# Altium PCB LED-V1.PcbDoc
Units mil, origin at the board's own origin, x right, y up, seen from the top; angles counter-clockwise.
Board outline 3897.64 x 3897.64 mil, 2 copper layers (Top Layer, Bottom Layer); 137 components, 105 nets, 345 pads, 51 vias.
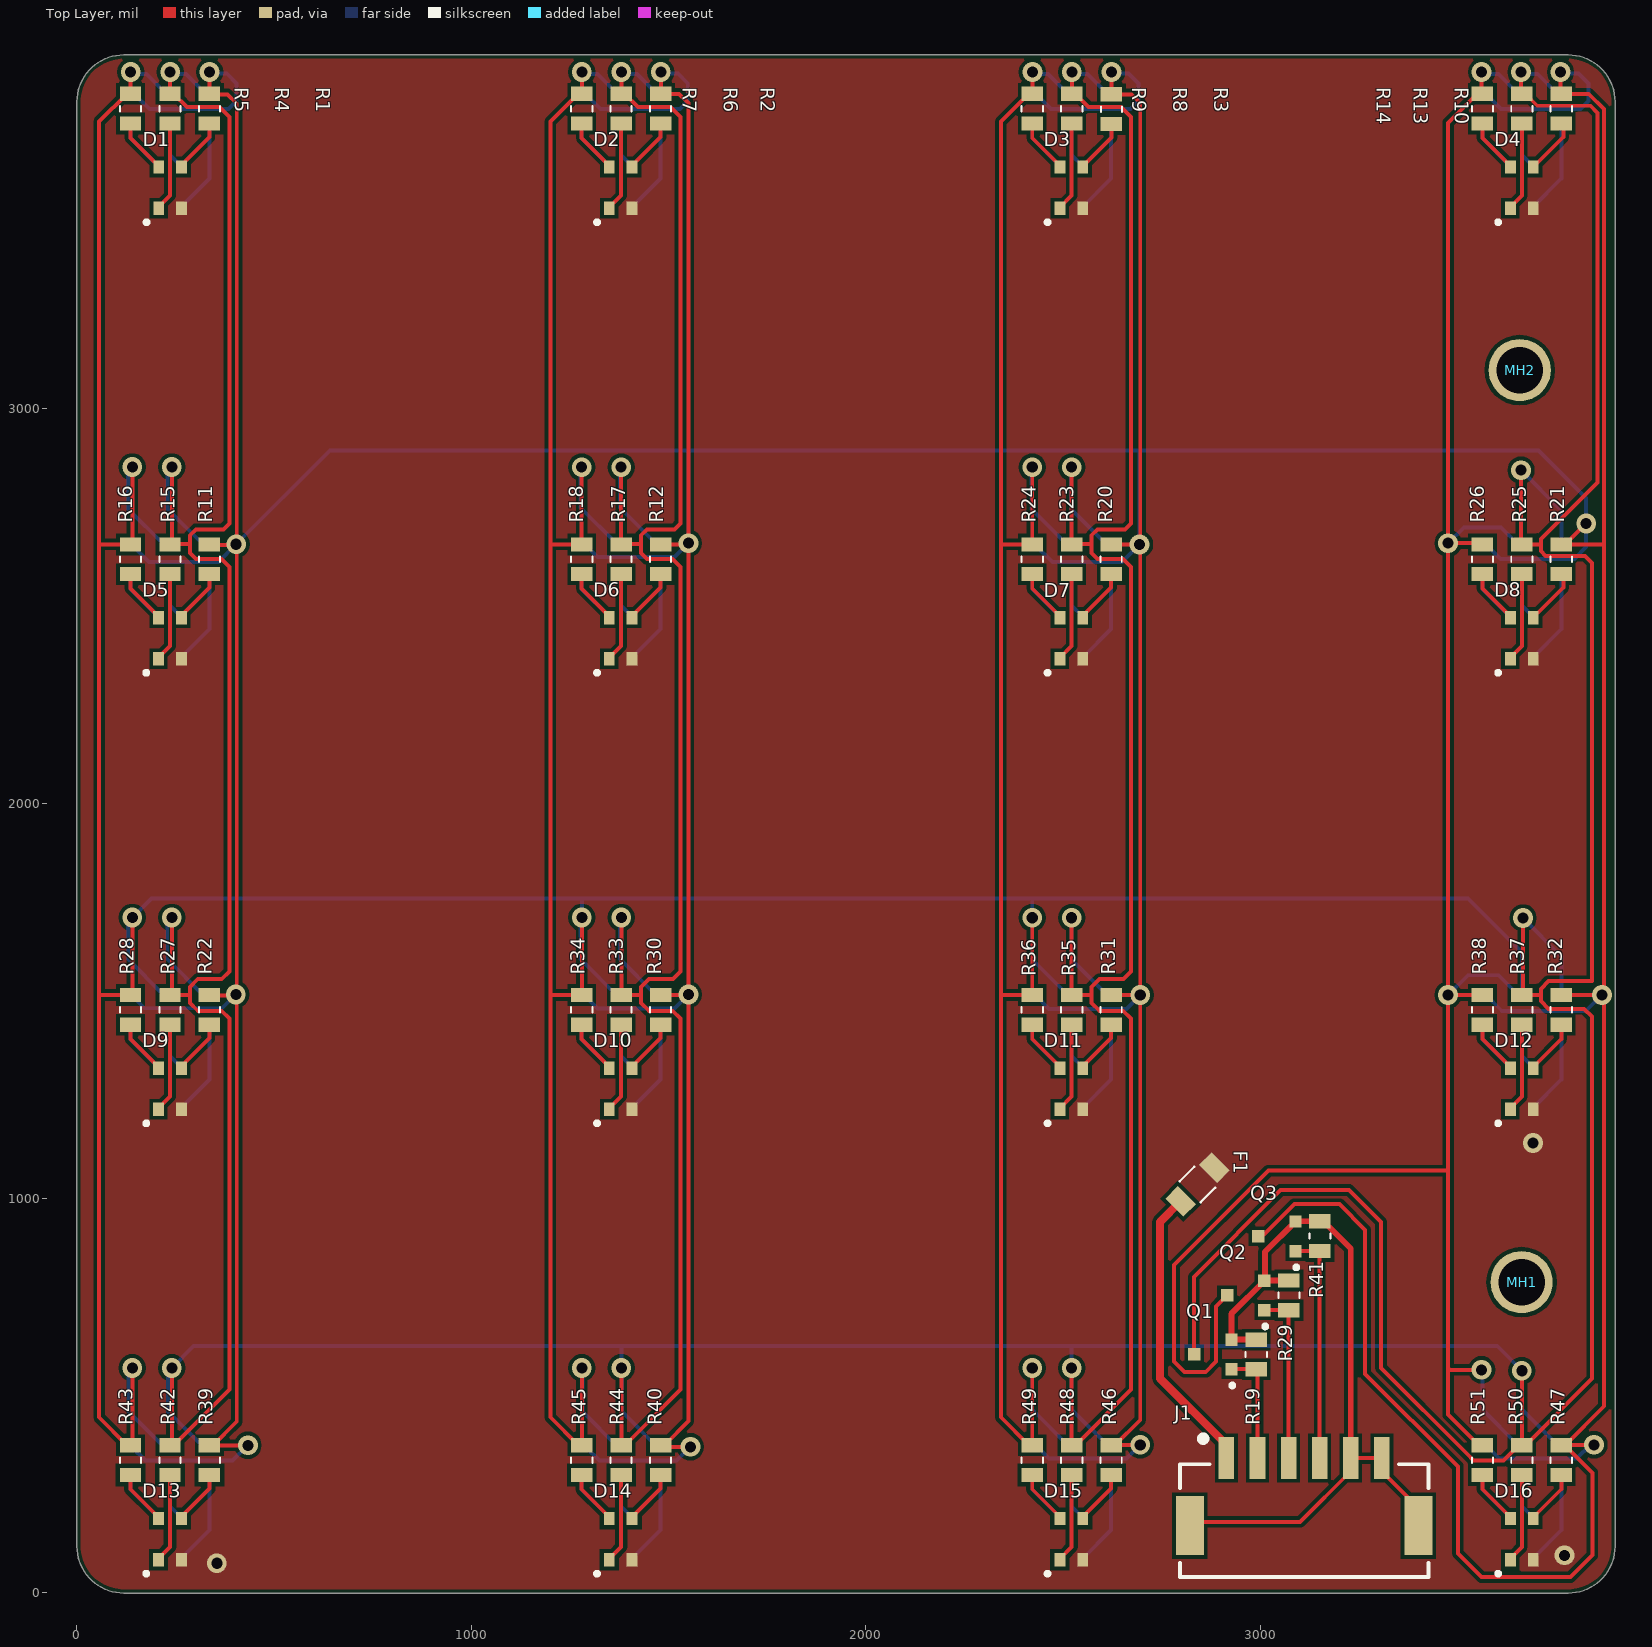
[diagram p0: Top Layer view]
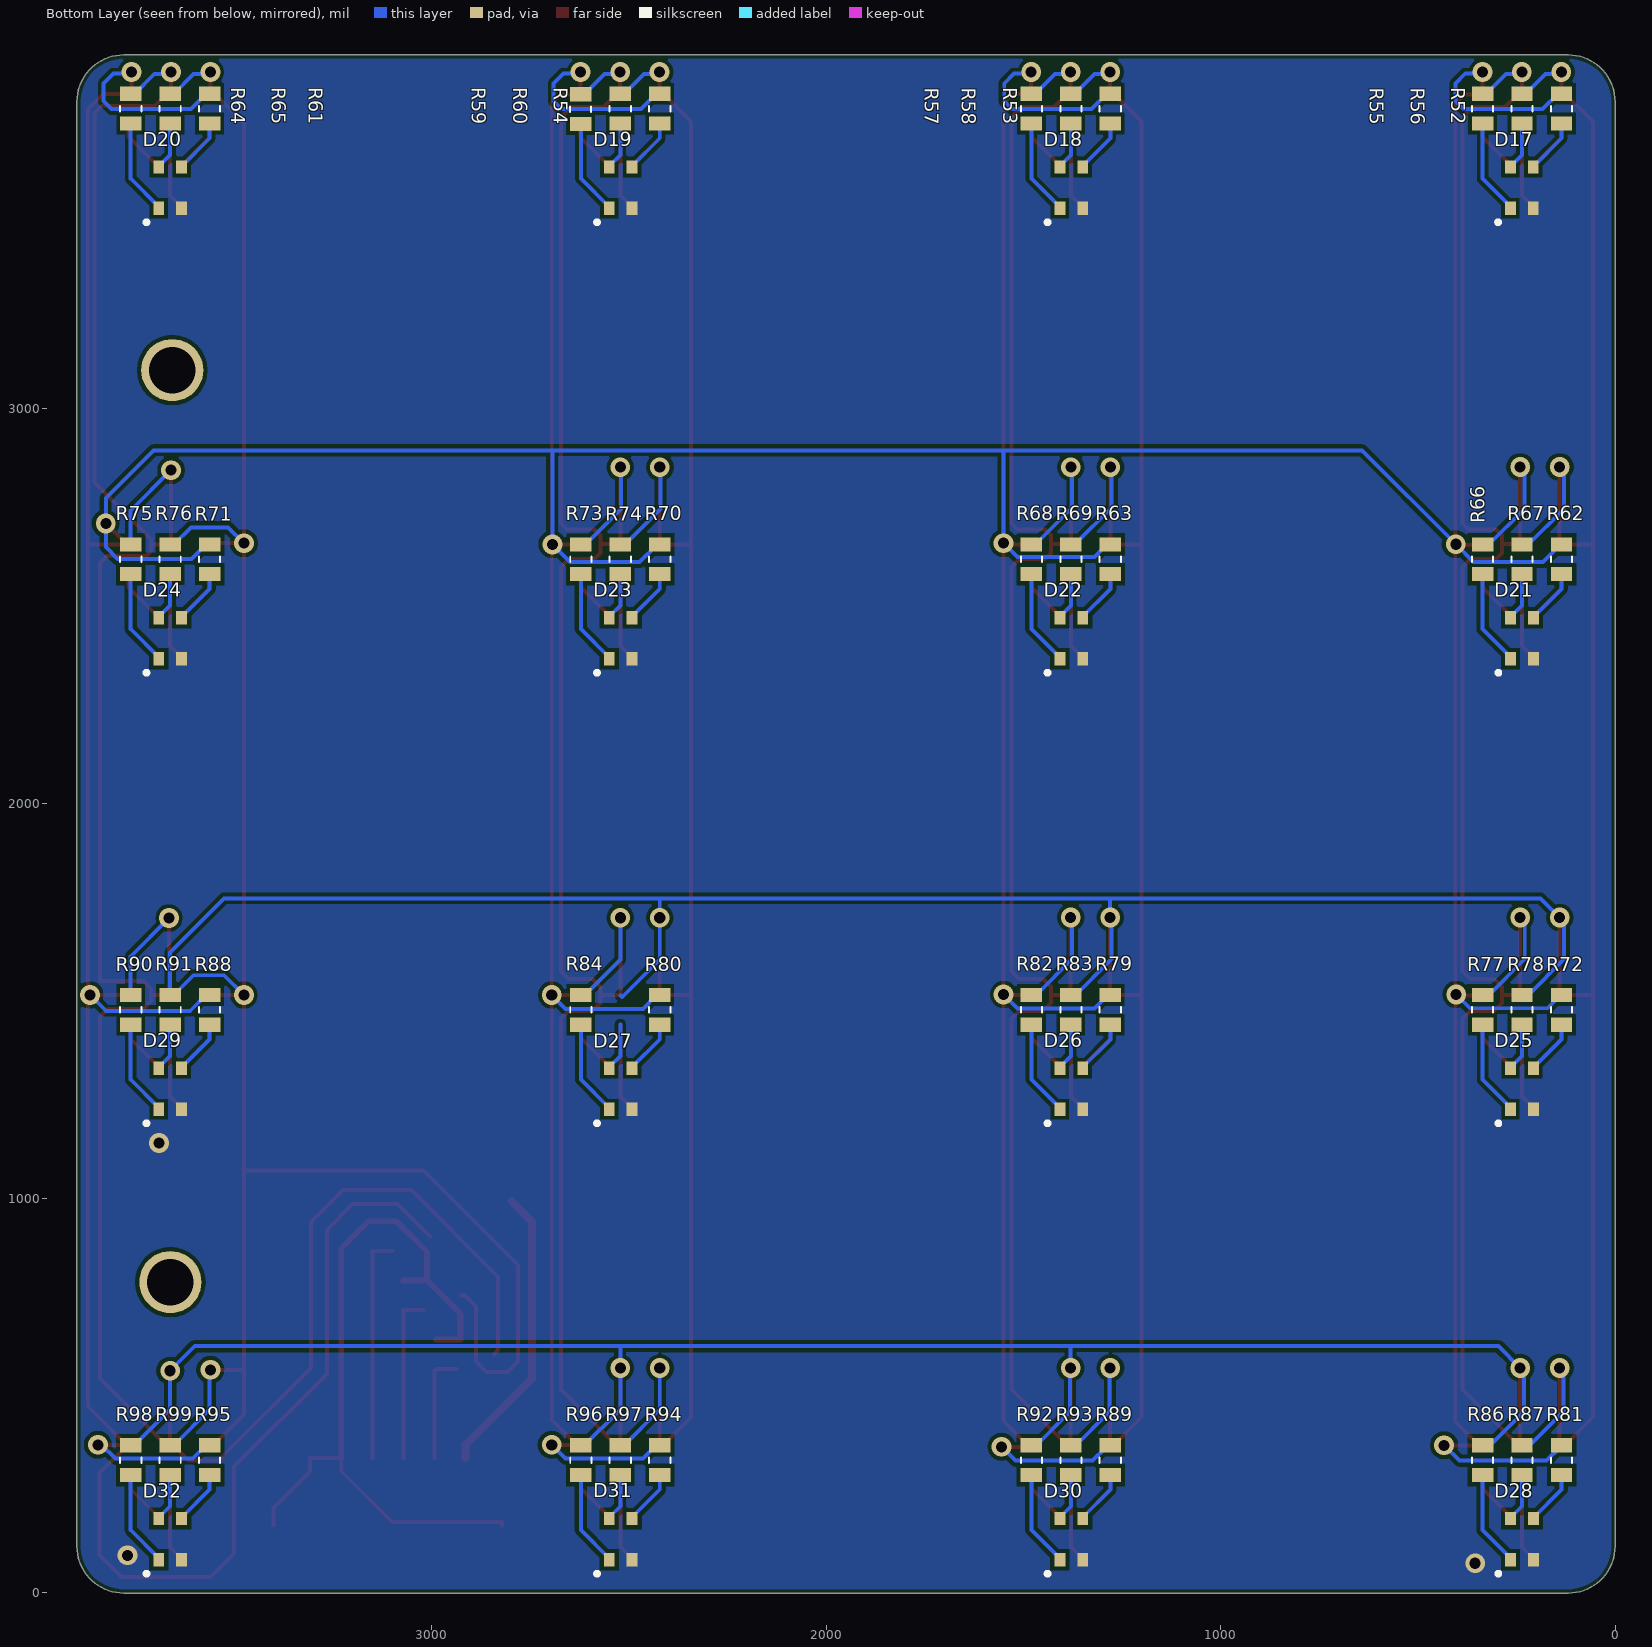
[diagram p1: Bottom Layer view, seen from below]
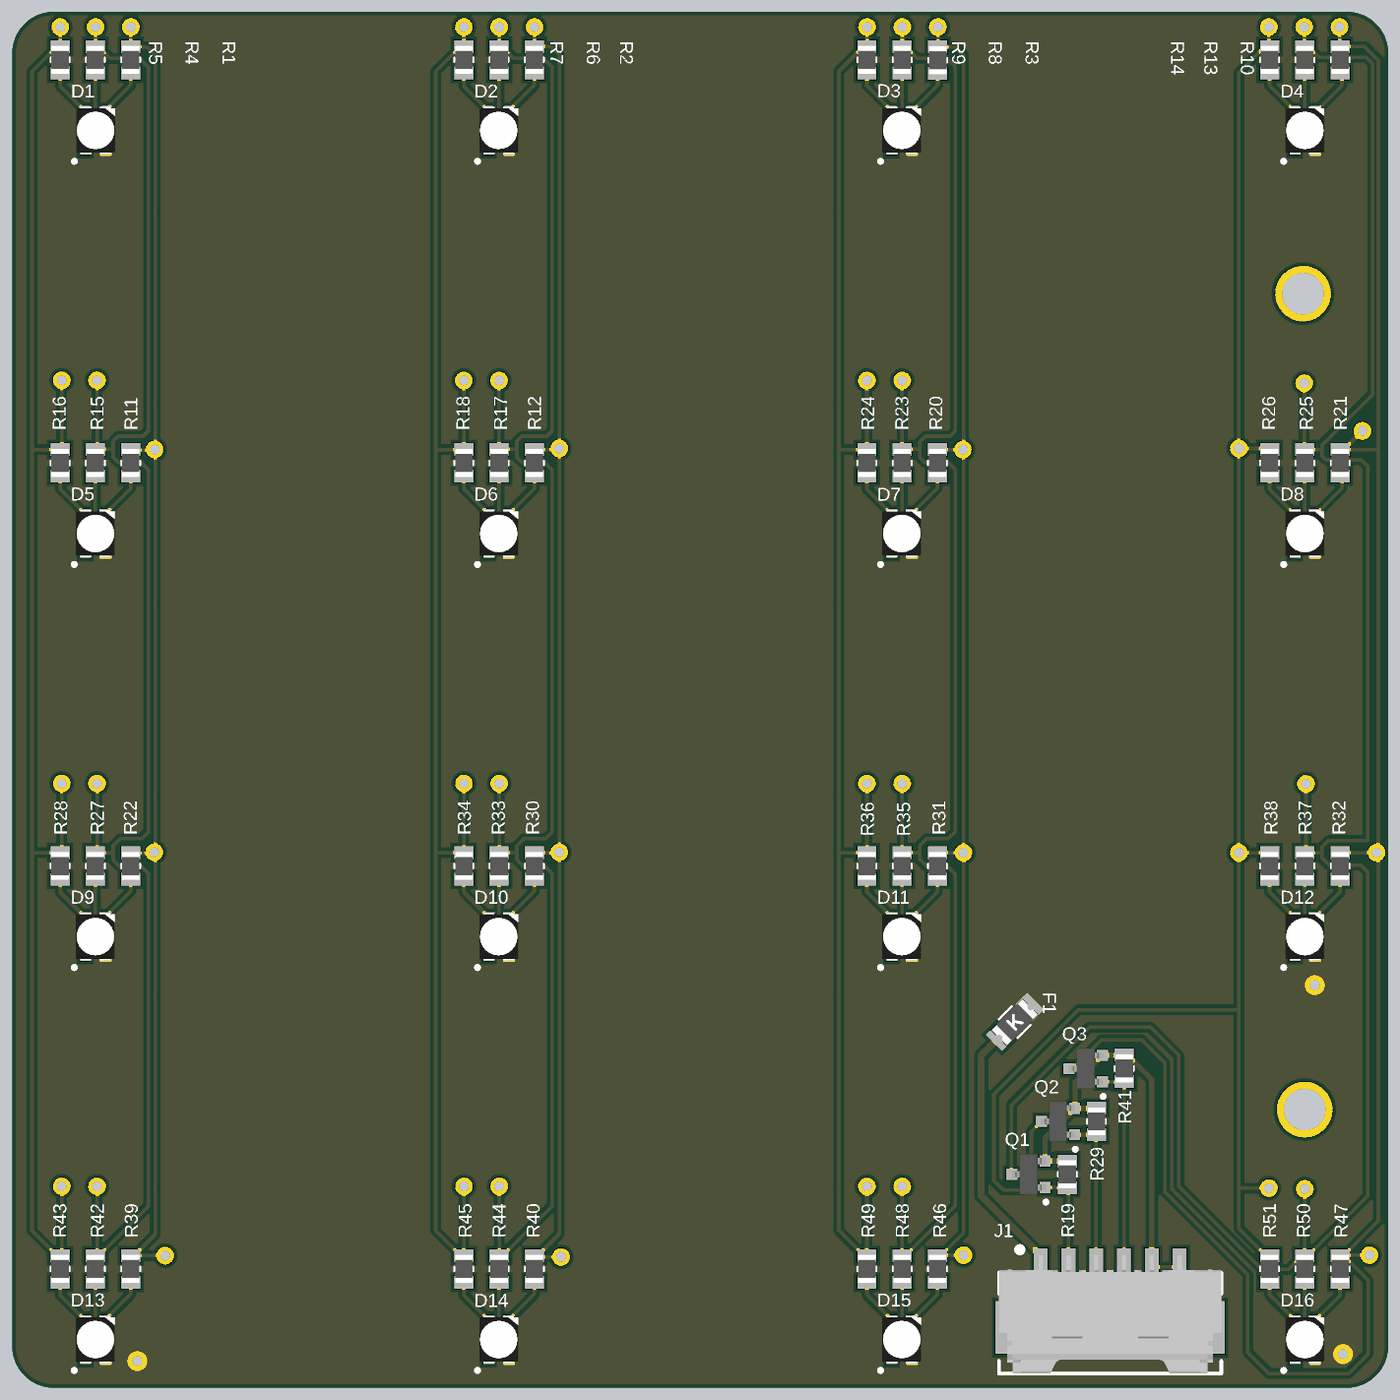
[diagram p2: 3D render of the assembled board from above, using the file's embedded part models]
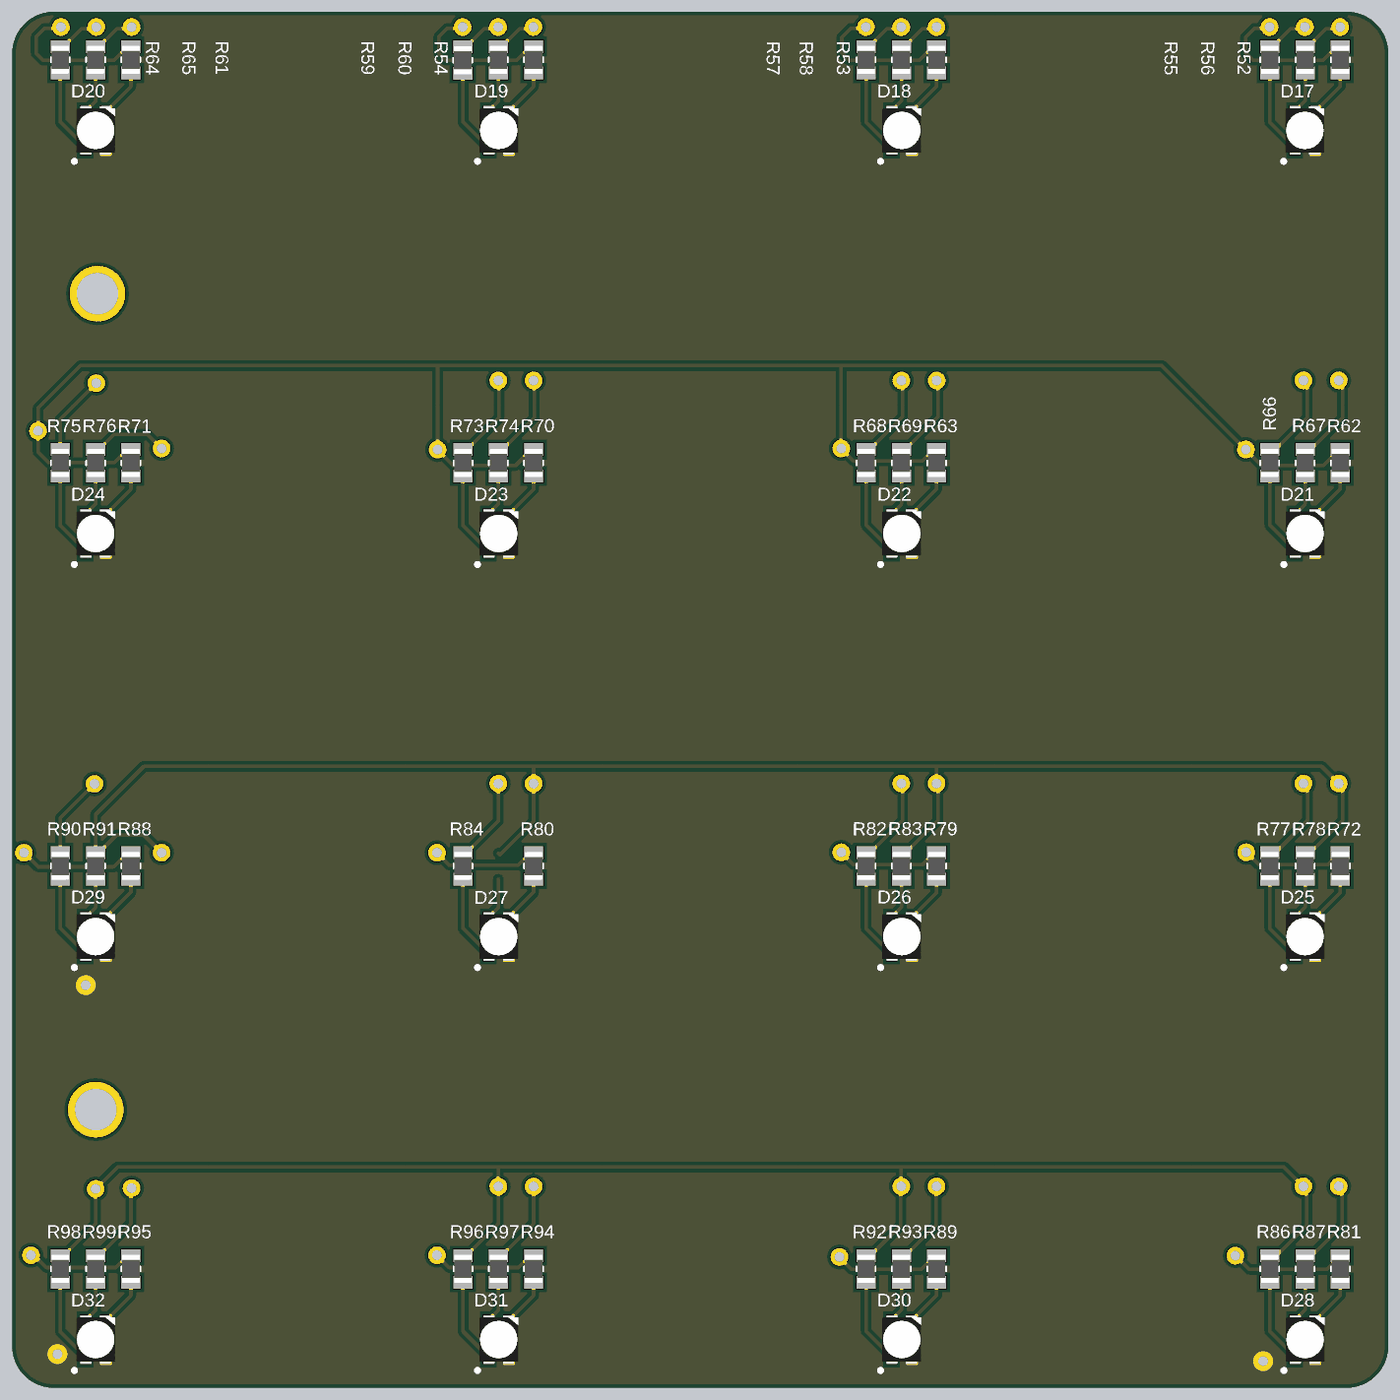
[diagram p3: 3D render of the assembled board from below, using the file's embedded part models]

## Layer stack, top to bottom
Top Solder: solder mask 0.4, Solder Resist, Dk 3.5
Top Layer: signal copper 1.4
Dielectric 1: dielectric 12.6, FR-4, Dk 4.8
Bottom Layer: signal copper 1.4
Bottom Solder: solder mask 0.4, Solder Resist, Dk 3.5

## Board outline
0.5,117.61 0.5,3779.03 cw(c118.61,3779.03) 118.61,3897.14 3780.03,3897.14 cw(c3780.03,3779.03) 3898.14,3779.03 3898.14,117.61 cw(c3780.03,117.61) 3780.03,-0.5 118.61,-0.5 cw(c118.61,117.61)

## Design rules (kind name [scope] priority, off if disabled: settings)
BoardOutlineClearance [All] p1: gap=15 ignorepadtopadclearanceinfootprint=FALSE
Clearance [All] p1: gap=6 ignorepadtopadclearanceinfootprint=FALSE except(0: Arc-Hole Track-Hole SMDPad-Hole THPad-Hole Via-Hole Fill-Hole Poly-Hole Region-Hole Text-Hole)
ComponentClearance [All] p1: gap=1 collisioncheckmode=3 verticalgap=1 showdistances=FALSE
DiffPairsRouting [All] p1: maxlimit=393.7 minlimit=6 mostfreqgap=8 toplayer_minwidth=6 toplayer_maxwidth=15 toplayer_prefwidth=8 bottomlayer_minwidth=6 bottomlayer_maxwidth=15 bottomlayer_prefwidth=8 maxuncoupledlength=500
HoleSize [All] p1: absolutevalues=TRUE maxlimit=265 minlimit=13 maxpercent=80.000 minpercent=20.000
HoleToHoleClearance [All] p1: gap=10 allowstackedmicrovias=FALSE
MinimumAnnularRing [All] p1: minimumring=7
MinimumSolderMaskSliver [All] p1: minsoldermaskwidth=0
PlaneClearance [All] p1: clearance=10
PlaneConnect [All] p1: planeconnectstyle=Direct reliefexpansion=16 reliefentries=4 reliefconductorwidth=6 reliefairgap=6
PolygonConnect [All] p1: connectstyle=Relief reliefconductorwidth=8 reliefentries=4 polygonreliefangle="90 Angle" airgapwidth=6
RoutingCorners [All] p1: cornerstyle=45-Degree minsetback=49.21 maxsetback=49.21
RoutingVias [All] p1: holewidth=15 width=30 viastyle="Through Hole" minholewidth=13 minwidth=27 maxholewidth=100 maxwidth=114
SilkToSilkClearance [All] p1: silktosilkclearance=0
SilkToSolderMaskClearance [IsPad] p1: minsilkscreentomaskgap=6 clearancetoexposedcopper=TRUE
SolderMaskExpansion [All] p1: expansion=2.95
Width [All] p1: maxlimit=400 minlimit=6 preferedwidth=8
20 further rules are at their usual default settings.

## Classes and differential pairs
component class "LED Matrix-2": D17 D18 D19 D20 D21 D22 D23 D24 D25 D26 D27 D28 D29 D30 D31 D32 R52 R53 R54 R55 R56 R57 R58 R59 R60 R61 R62 R63 R64 R65 R66 R67 R68 R69 R70 R71 R72 R73 R74 R75 R76 R77 R78 R79 R80 R81 R82 R83 R84 R85 R86 R87 R88 R89 R90 R91 R92 R93 R94 R95 R96 R97 R98 R99
component class "LED Matrix": D1 D2 D3 D4 D5 D6 D7 D8 D9 D10 D11 D12 D13 D14 D15 D16 F1 J1 MH1 MH2 Q1 Q2 Q3 R1 R2 R3 R4 R5 R6 R7 R8 R9 R10 R11 R12 R13 R14 R15 R16 R17 R18 R19 R20 R21 R22 R23 R24 R25 R26 R27 R28 R29 R30 R31 R32 R33 R34 R35 R36 R37 R38 R39 R40 R41 R42 R43 R44 R45 R46 R47 R48 R49 R50 R51

## Components (designator, comment, footprint, x,y, rotation, side; value= is the part's Value field where it differs from the comment)
D1 "LED_RGB" LED_RGB 236.72,3560.92 r0 top
D2 "LED_RGB" LED_RGB 1378.45,3560.92 r0 top
D3 "LED_RGB" LED_RGB 2520.19,3560.92 r0 top
D4 "LED_RGB" LED_RGB 3661.92,3560.92 r0 top
D5 "LED_RGB" LED_RGB 236.22,2419.19 r0 top
D6 "LED_RGB" LED_RGB 1378.45,2419.19 r0 top
D7 "LED_RGB" LED_RGB 2520.19,2419.19 r0 top
D8 "LED_RGB" LED_RGB 3661.92,2419.19 r0 top
D9 "LED_RGB" LED_RGB 236.22,1277.46 r0 top
D10 "LED_RGB" LED_RGB 1378.45,1277.46 r0 top
D11 "LED_RGB" LED_RGB 2520.19,1277.46 r0 top
D12 "LED_RGB" LED_RGB 3661.92,1277.46 r0 top
D13 "LED_RGB" LED_RGB 236.22,136.22 r0 top
D14 "LED_RGB" LED_RGB 1378.45,136.22 r0 top
D15 "LED_RGB" LED_RGB 2520.19,136.22 r0 top
D16 "LED_RGB" LED_RGB 3661.92,136.22 r0 top
D17 "LED_RGB" LED_RGB 236.72,3560.92 r180 bottom
D18 "LED_RGB" LED_RGB 1378.45,3560.92 r180 bottom
D19 "LED_RGB" LED_RGB 2520.19,3560.92 r180 bottom
D20 "LED_RGB" LED_RGB 3661.92,3560.92 r180 bottom
D21 "LED_RGB" LED_RGB 236.22,2419.19 r180 bottom
D22 "LED_RGB" LED_RGB 1378.45,2419.19 r180 bottom
D23 "LED_RGB" LED_RGB 2520.19,2419.19 r180 bottom
D24 "LED_RGB" LED_RGB 3661.92,2419.19 r180 bottom
D25 "LED_RGB" LED_RGB 236.22,1277.46 r180 bottom
D26 "LED_RGB" LED_RGB 1378.45,1277.46 r180 bottom
D27 "LED_RGB" LED_RGB 2520.19,1277.46 r180 bottom
D28 "LED_RGB" LED_RGB 236.22,136.22 r180 bottom
D29 "LED_RGB" LED_RGB 3661.92,1277.46 r180 bottom
D30 "LED_RGB" LED_RGB 1378.45,136.22 r180 bottom
D31 "LED_RGB" LED_RGB 2520.19,136.22 r180 bottom
D32 "LED_RGB" LED_RGB 3661.92,136.22 r180 bottom
F1 "FUSE_3A_1206" FUSE_1206 2840,1035 r45 top
J1 "CON_6M_SM_RA" MOLEX-5024940670 3110.24,255.91 r0 top
MH1 "MOUNTING_HOLES" MOUNTING_HOLE 3661.42,787.4 r0 top
MH2 "MOUNTING_HOLES" MOUNTING_HOLE 3656.66,3098.43 r0 top
Q1 "NMOS_20V_6A" NMOS_SOT23-3 2878.98,604.33 r90 top
Q2 "NMOS_20V_6A" NMOS_SOT23-3 2962.44,753.94 r90 top
Q3 "NMOS_20V_6A" NMOS_SOT23-3 3041.18,903.54 r90 top
R1 "RES_430R_0805" RESC2012X60N 336.22,3760.92 r270 top value=430R
R2 "RES_430R_0805" RESC2012X60N 1479.58,3760.92 r270 top value=430R
R3 "RES_430R_0805" RESC2012X60N 2622.05,3759.84 r270 top value=430R
R4 "RES_510R_0805" RESC2012X60N 236.22,3760.92 r90 top value=510R
R5 "RES_430R_0805" RESC2012X60N 136.22,3760.92 r270 top value=430R
R6 "RES_510R_0805" RESC2012X60N 1379.57,3760.92 r90 top value=510R
R7 "RES_430R_0805" RESC2012X60N 1279.58,3760.92 r270 top value=430R
R8 "RES_510R_0805" RESC2012X60N 2521.31,3760.92 r90 top value=510R
R9 "RES_430R_0805" RESC2012X60N 2421.31,3760.92 r270 top value=430R
R10 "RES_430R_0805" RESC2012X60N 3761.92,3760.92 r270 top value=430R
R11 "RES_430R_0805" RESC2012X60N 336.22,2619.19 r270 top value=430R
R12 "RES_430R_0805" RESC2012X60N 1479.58,2619.19 r270 top value=430R
R13 "RES_510R_0805" RESC2012X60N 3661.92,3760.92 r90 top value=510R
R14 "RES_430R_0805" RESC2012X60N 3561.92,3760.92 r270 top value=430R
R15 "RES_510R_0805" RESC2012X60N 236.22,2619.19 r90 top value=510R
R16 "RES_430R_0805" RESC2012X60N 136.22,2619.19 r270 top value=430R
R17 "RES_510R_0805" RESC2012X60N 1379.57,2619.19 r90 top value=510R
R18 "RES_430R_0805" RESC2012X60N 1279.58,2619.19 r270 top value=430R
R19 "RES_510R_0805" RESC2012X60N 2988.98,604.07 r270 top value=510R
R20 "RES_430R_0805" RESC2012X60N 2621.31,2619.19 r270 top value=430R
R21 "RES_430R_0805" RESC2012X60N 3761.92,2619.19 r270 top value=430R
R22 "RES_430R_0805" RESC2012X60N 336.22,1477.46 r270 top value=430R
R23 "RES_510R_0805" RESC2012X60N 2521.31,2619.19 r90 top value=510R
R24 "RES_430R_0805" RESC2012X60N 2421.31,2619.19 r270 top value=430R
R25 "RES_510R_0805" RESC2012X60N 3661.92,2619.19 r90 top value=510R
R26 "RES_430R_0805" RESC2012X60N 3561.92,2619.19 r270 top value=430R
R27 "RES_510R_0805" RESC2012X60N 236.22,1477.46 r90 top value=510R
R28 "RES_430R_0805" RESC2012X60N 136.22,1477.46 r270 top value=430R
R29 "RES_510R_0805" RESC2012X60N 3071.65,754.07 r270 top value=510R
R30 "RES_430R_0805" RESC2012X60N 1479.58,1477.46 r270 top value=430R
R31 "RES_430R_0805" RESC2012X60N 2621.31,1477.46 r270 top value=430R
R32 "RES_430R_0805" RESC2012X60N 3761.92,1477.46 r270 top value=430R
R33 "RES_510R_0805" RESC2012X60N 1379.57,1477.46 r90 top value=510R
R34 "RES_430R_0805" RESC2012X60N 1279.58,1477.46 r270 top value=430R
R35 "RES_510R_0805" RESC2012X60N 2521.31,1477.46 r90 top value=510R
R36 "RES_430R_0805" RESC2012X60N 2421.31,1477.46 r270 top value=430R
R37 "RES_510R_0805" RESC2012X60N 3661.92,1477.46 r90 top value=510R
R38 "RES_430R_0805" RESC2012X60N 3561.92,1477.46 r270 top value=430R
R39 "RES_430R_0805" RESC2012X60N 336.22,336.22 r270 top value=430R
R40 "RES_430R_0805" RESC2012X60N 1479.58,336.22 r270 top value=430R
R41 "RES_510R_0805" RESC2012X60N 3150.39,904.07 r270 top value=510R
R42 "RES_510R_0805" RESC2012X60N 236.22,336.22 r90 top value=510R
R43 "RES_430R_0805" RESC2012X60N 136.22,336.22 r270 top value=430R
R44 "RES_510R_0805" RESC2012X60N 1379.57,336.22 r90 top value=510R
R45 "RES_430R_0805" RESC2012X60N 1279.58,336.22 r270 top value=430R
R46 "RES_430R_0805" RESC2012X60N 2621.31,336.22 r270 top value=430R
R47 "RES_430R_0805" RESC2012X60N 3761.92,336.22 r270 top value=430R
R48 "RES_510R_0805" RESC2012X60N 2521.31,336.22 r90 top value=510R
R49 "RES_430R_0805" RESC2012X60N 2421.31,336.22 r270 top value=430R
R50 "RES_510R_0805" RESC2012X60N 3661.92,336.22 r90 top value=510R
R51 "RES_430R_0805" RESC2012X60N 3561.92,336.22 r270 top value=430R
R52 "RES_430R_0805" RESC2012X60N 136.22,3760.92 r270 bottom value=430R
R53 "RES_430R_0805" RESC2012X60N 1279.58,3760.92 r270 bottom value=430R
R54 "RES_430R_0805" RESC2012X60N 2421.31,3760.92 r270 bottom value=430R
R55 "RES_510R_0805" RESC2012X60N 336.22,3760.92 r90 bottom value=510R
R56 "RES_430R_0805" RESC2012X60N 236.22,3760.92 r270 bottom value=430R
R57 "RES_510R_0805" RESC2012X60N 1479.58,3760.92 r90 bottom value=510R
R58 "RES_430R_0805" RESC2012X60N 1379.58,3760.92 r270 bottom value=430R
R59 "RES_510R_0805" RESC2012X60N 2622.05,3759.84 r90 bottom value=510R
R60 "RES_430R_0805" RESC2012X60N 2521.31,3760.92 r270 bottom value=430R
R61 "RES_430R_0805" RESC2012X60N 3561.92,3760.92 r270 bottom value=430R
R62 "RES_430R_0805" RESC2012X60N 136.22,2619.19 r270 bottom value=430R
R63 "RES_430R_0805" RESC2012X60N 1279.58,2619.19 r270 bottom value=430R
R64 "RES_510R_0805" RESC2012X60N 3761.92,3760.92 r90 bottom value=510R
R65 "RES_430R_0805" RESC2012X60N 3661.92,3760.92 r270 bottom value=430R
R66 "RES_510R_0805" RESC2012X60N 336.22,2619.19 r90 bottom value=510R
R67 "RES_430R_0805" RESC2012X60N 236.22,2619.19 r270 bottom value=430R
R68 "RES_510R_0805" RESC2012X60N 1479.58,2619.19 r90 bottom value=510R
R69 "RES_430R_0805" RESC2012X60N 1379.57,2619.19 r270 bottom value=430R
R70 "RES_430R_0805" RESC2012X60N 2421.31,2619.19 r270 bottom value=430R
R71 "RES_430R_0805" RESC2012X60N 3561.92,2619.19 r270 bottom value=430R
R72 "RES_430R_0805" RESC2012X60N 136.22,1477.46 r270 bottom value=430R
R73 "RES_510R_0805" RESC2012X60N 2621.31,2619.19 r90 bottom value=510R
R74 "RES_430R_0805" RESC2012X60N 2521.31,2619.19 r270 bottom value=430R
R75 "RES_510R_0805" RESC2012X60N 3761.92,2619.19 r90 bottom value=510R
R76 "RES_430R_0805" RESC2012X60N 3661.92,2619.19 r270 bottom value=430R
R77 "RES_510R_0805" RESC2012X60N 336.22,1477.46 r90 bottom value=510R
R78 "RES_430R_0805" RESC2012X60N 236.22,1477.46 r270 bottom value=430R
R79 "RES_430R_0805" RESC2012X60N 1279.58,1477.46 r270 bottom value=430R
R80 "RES_430R_0805" RESC2012X60N 2421.31,1477.46 r270 bottom value=430R
R81 "RES_430R_0805" RESC2012X60N 136.22,336.22 r270 bottom value=430R
R82 "RES_510R_0805" RESC2012X60N 1479.58,1477.46 r90 bottom value=510R
R83 "RES_430R_0805" RESC2012X60N 1379.57,1477.46 r270 bottom value=430R
R84 "RES_510R_0805" RESC2012X60N 2621.31,1477.46 r90 bottom value=510R
R86 "RES_510R_0805" RESC2012X60N 336.22,336.22 r90 bottom value=510R
R87 "RES_430R_0805" RESC2012X60N 236.22,336.22 r270 bottom value=430R
R88 "RES_430R_0805" RESC2012X60N 3561.92,1477.46 r270 bottom value=430R
R89 "RES_430R_0805" RESC2012X60N 1279.58,336.22 r270 bottom value=430R
R90 "RES_510R_0805" RESC2012X60N 3761.92,1477.46 r90 bottom value=510R
R91 "RES_430R_0805" RESC2012X60N 3661.92,1477.46 r270 bottom value=430R
R92 "RES_510R_0805" RESC2012X60N 1479.58,336.22 r90 bottom value=510R
R93 "RES_430R_0805" RESC2012X60N 1379.57,336.22 r270 bottom value=430R
R94 "RES_430R_0805" RESC2012X60N 2421.31,336.22 r270 bottom value=430R
R95 "RES_430R_0805" RESC2012X60N 3561.92,336.22 r270 bottom value=430R
R96 "RES_510R_0805" RESC2012X60N 2621.31,336.22 r90 bottom value=510R
R97 "RES_430R_0805" RESC2012X60N 2521.31,336.22 r270 bottom value=430R
R98 "RES_510R_0805" RESC2012X60N 3761.92,336.22 r90 bottom value=510R
R99 "RES_430R_0805" RESC2012X60N 3661.92,336.22 r270 bottom value=430R

## Footprints (in the part's own frame and the unit in brackets; to place one, negate y for a bottom-side part, rotate by r counter-clockwise, add the part's x,y. Pads: shape width x height; smd on the part's side, far side on the other; paste and mask are expansions set on the pad)
FUSE_1206 [mil]
  rect 45x65 smd mask+1: 1(-60.5,0) 2(60.5,0)
  silkscreen extent -26,-37 26,37, body extent -65,-32 65,32, height 32
LED_RGB [mm]
  rect 0.7x0.86 smd: 1(-0.737,-1.325) 2(-0.737,1.325) 3(0.738,1.325) 4(0.738,-1.325)
  silkscreen extent -1.65,-2.35 -1.4,-2.1, body extent -1.4,-1.75 1.4,1.75, height 1.89
MOLEX-5024940670 [mm] "Molex 5024940670 6 pin 2mm pitch SMD RA connector"
  rect 1.8x3.8 smd: 0(-7.35,-2.175) 0(7.35,-2.175)
  rect 1x2.7 smd: 1(-5,2.175) 2(-3,2.175) 3(-1,2.175) 4(1,2.175) 5(3,2.175) 6(5,2.175)
  silkscreen extent -8,-5.49 8,3.62, body extent -8,-5.49 8,3.01, height 6.91
MOUNTING_HOLE [mm]
  round 4 hole 3 unplated: 0(0,0)
NMOS_SOT23-3 [mm] "SOT23, 3 pins, Body 2.90mm x 2.80mm"
  rect 0.8x0.8 smd: 1(-0.95,-1.2) 2(0.95,-1.2) 3(0,1.2)
  silkscreen extent -2.12,-1.38 -1.88,-1.13, body extent -1.46,-1.25 1.46,1.23, height 1
RESC2012X60N [mm]
  rect 0.92x1.38 smd: 1(-0.955,0) 2(0.955,0)
  silkscreen extent -0.17,-0.68 0.17,0.68, body extent -1,-0.62 1,0.62, height 0.6

## Part data
D1 D2 D3 D4 D5 D6 D7 D8 D9 D10 D11 D12 D13 D14 D15 D16 D17 D18 D19 D20 D21 D22 D23 D24 D25 D26 D27 D28 D29 D30 D31 D32: "LED RGB DIFFUSED 4PLCC SMD", Case/Package=PLCC, Color=Blue,Green,Red, Forward Voltage=3.1V, Lens Color=White, Manufacturer 1=Broadcom, Manufacturer Part Number 1=ASMB-MTB1-0A3A2, Supplier Part Number 1=516-3280-1-ND, Test Current=20mA, ComponentLink1Description=http://www.farnell.com/datasheets/2111106.pdf?src-supplier=Farnell, ComponentLink1URL=http://www.farnell.com/datasheets/2111106.pdf?src-supplier=Farnell, ComponentLink2Description=https://docs.broadcom.com/docs/AV02-4194EN?src-supplier=Digi-Key, ComponentLink2URL=https://docs.broadcom.com/docs/AV02-4194EN?src-supplier=Digi-Key, ComponentLink3Description=http://www.farnell.com/datasheets/1801564.pdf?src-supplier=Element14, ComponentLink3URL=http://www.farnell.com/datasheets/1801564.pdf?src-supplier=Element14, ComponentLink4Description=http://www.farnell.com/datasheets/2111106.pdf?src-supplier=Newark, ComponentLink4URL=http://www.farnell.com/datasheets/2111106.pdf?src-supplier=Newark, Dominant Wavelength=470nm, Height=1.9mm, Length=3.2mm, Lens Style=Round, Lens Transparency=Diffused, Luminous Intensity=350mcd, Mount="Surface Mount", Number of Pins=4, Packaging="Cut Tape", Pricing 1="1=0.60000, 10=0.47100, 100=0.30210, 500=0.25980, 1000=0.20059 (USD)", REACH SVHC="No SVHC", RoHS=Yes, Stock 1=142531, Supplier 1=Digi-Key, Viewing Angle=115°, Width=2.8mm
F1: "FUSE BOARD MNT 3A 32VAC/VDC 1206", Case/Package=1206, Case Code (Metric)=3216, Current Rating=3A, DC Cold Resistance=0.02R, Manufacturer 1=Littelfuse, Manufacturer Part Number 1=0466003.NR, Max Operating Temperature=90°C, Min Operating Temperature=-55°C, Package Quantity=5000, Power Dissipation=228mW, Supplier Part Number 1=F1458CT-ND, Voltage Rating (AC)=32V, Approvals=UL,CSA, Case Code (Imperial)=1206, Composition="Thin Film", Fuse Current=3A, Fuse Type="Board Mount (Cartridge Style Excluded)", Height=0.023inch, Lead Free="Lead Free", Length=3.18mm, Mount="Surface Mount", Number of Pins=2, Packaging="Cut Tape", Pricing 1="1=1.20000, 5=1.16600, 10=1.09100, 50=0.90280, 100=0.75240, 250=0.73360, 500=0.62074, 1000=0.54549 (USD)", Radiation Hardening=No, REACH SVHC=Unknown, Resistance=0.02R, Response Time="Fast Blow", RoHS=Yes, Stock 1=10729, Supplier 1=Digi-Key, Voltage Rating (DC)=32V, Width=1.52mm, Working Voltage=32V
J1: "CONN HEADER SMD RIGHT ANGLE 2MM PITCH", Color=Natural, Current Rating=3A, Flammability Rating="UL94 V-0", Insulation Resistance=1GR, Manufacturer 1=Molex, Manufacturer Part Number 1=502494-0670, Max Operating Temperature=85°C, Max Voltage Rating (AC)=250V, Min Operating Temperature=-25°C, Package Quantity=950, Supplier Part Number 1=WM2283CT-ND, ComponentLink1Description=https://datasheet.ciiva.com/755/5024940670-sd-755844.pdf?src-supplier=Digi-Key, ComponentLink1URL=https://datasheet.ciiva.com/755/5024940670-sd-755844.pdf?src-supplier=Digi-Key, ComponentLink2Description=https://datasheet.ciiva.com/24467/101355024940670-pcb-receptacles-24467588.pdf?src-supplier=Onlinecomponents.com, ComponentLink2URL=https://datasheet.ciiva.com/24467/101355024940670-pcb-receptacles-24467588.pdf?src-supplier=Onlinecomponents.com, ComponentLink3Description=https://datasheet.ciiva.com/16656/5024940670-pcb-receptacles-16656439.pdf?src-supplier=Avnet+Europe, ComponentLink3URL=https://datasheet.ciiva.com/16656/5024940670-pcb-receptacles-16656439.pdf?src-supplier=Avnet+Europe, ComponentLink4Description=https://datasheet.ciiva.com/7436/1630854-7436283.pdf?src-supplier=Newark, ComponentLink4URL=https://datasheet.ciiva.com/7436/1630854-7436283.pdf?src-supplier=Newark, ComponentLink5Description=https://datasheet.ciiva.com/5157/5024940670-pcb-receptacles-179322-5157180.pdf?src-supplier=Mouser, ComponentLink5URL=https://datasheet.ciiva.com/5157/5024940670-pcb-receptacles-179322-5157180.pdf?src-supplier=Mouser, ComponentLink6Description=https://datasheet.ciiva.com/7917/1630854-7917014.pdf?src-supplier=Element14, ComponentLink6URL=https://datasheet.ciiva.com/7917/1630854-7917014.pdf?src-supplier=Element14, ComponentLink7Description=https://datasheet.ciiva.com/30242/101355024940670-pcb-receptacles-30242550.pdf?src-supplier=Onlinecomponents.com, ComponentLink7URL=https://datasheet.ciiva.com/30242/101355024940670-pcb-receptacles-30242550.pdf?src-supplier=Onlinecomponents.com, ComponentLink8Description=https://datasheet.ciiva.com/755/5024940670-sd-755789.pdf?src-supplier=Digi-Key, ComponentLink8URL=https://datasheet.ciiva.com/755/5024940670-sd-755789.pdf?src-supplier=Digi-Key, Connector Type=Receptacle,Forked, Contact Gender=Female, Contact Material="Copper Alloy", Contact Plating=Tin, Depth=6.85mm, Fastening Type=Latch, Gender=Receptacle, Glow Wire Compliant=Non-compliant, Housing Color=Natural, Housing Material=PBT, Length=16mm, Material=Polybutylene, Max Voltage Rating (DC)=250V, Mount="Surface Mount", Number of Circuits=6, Number of Contacts=6, Number of Positions=6, Number of Rows=1, Orientation="Right Angle", Packaging="Tape and Reel", Pitch=2mm, Pricing 1="1=0.81000, 10=0.70800, 25=0.66680, 50=0.63880, 100=0.61110, 250=0.55552 (USD)", Radiation Hardening=No, REACH SVHC=Unknown, RoHS=Yes, Stock 1=7093, Supplier 1=Digi-Key, Termination=Solder, Voltage Rating=250V
MH1 MH2: "6cm x 6cm"
Q1 Q2 Q3: "MOSFET N-CH 20V 6A SOT23", Manufacturer 1="Alpha & Omega", Manufacturer Part Number 1=AO3420, Package="TO-236-3, SC-59, SOT-23-3", Supplier Part Number 1=785-1014-1-ND, ComponentLink1Description=Datasheet, ComponentLink1URL=http://aosmd.com/res/data_sheets/AO3420.pdf, Mount="Surface Mount", Supplier 1=Digi-Key
R1 R2 R3 R5 R7 R9 R10 R11 R12 R14 R16 R18 R20 R21 R22 R24 R26 R28 R30 R31 R32 R34 R36 R38 R39 R40 R43 R45 R46 R47 R49 R51 R52 R53 R54 R56 R58 R60 R61 R62 R63 R65 R67 R69 R70 R71 R72 R74 R76 R78 R79 R80 R81 R83 R87 R88 R89 R91 R93 R94 R95 R97 R99: "RES SMD 430 OHM 1% 1/8W 0805", Case/Package=Molded, Case Code (Imperial)=0805, Case Code (Metric)=2012, Manufacturer 1="Vishay Dale", Manufacturer Part Number 1=CRCW0805430RFKEA, Max Operating Temperature=155°C, Min Operating Temperature=-55°C, Power Rating=125mW, Resistance=430R, Supplier Part Number 1=541-430CCT-ND, Temperature Coefficient=100ppm/°C, Tolerance=1%, Voltage Rating=150V, ComponentLink1Description=Datasheet, ComponentLink1URL=http://www.vishay.com/docs/20035/dcrcwe3.pdf, Composition="Thick Film", Contact Plating=Tin,Lead,Matte, Depth=1.25mm, Lead Free="Lead Free", Length=2mm, Military Standard=Not, Mount="Surface Mount", Packaging="Tape and Reel", Pricing 1="1=0.10000, 10=0.03500, 100=0.01400, 1000=0.00631, 2500=0.00548 (USD)", Radiation Hardening=No, REACH SVHC=Unknown, RoHS=Yes, Stock 1=2755291, Supplier 1=Digi-Key, Termination=SMD/SMT
R4 R6 R8 R13 R15 R17 R19 R23 R25 R27 R29 R33 R35 R37 R41 R42 R44 R48 R50 R55 R57 R59 R64 R66 R68 R73 R75 R77 R82 R84 R86 R90 R92 R96 R98: "RES SMD 510 OHM 1% 1/8W 0805", Case/Package=Molded, Case Code (Imperial)=0805, Case Code (Metric)=2012, Manufacturer 1="Vishay Dale", Manufacturer Part Number 1=CRCW0805510RFKEA, Max Operating Temperature=155°C, Min Operating Temperature=-55°C, Power Rating=125mW, Resistance=510R, Supplier Part Number 1=541-510CCT-ND, Temperature Coefficient=100ppm/°C, Tolerance=1%, Voltage Rating=150V, ComponentLink1Description=Datasheet, ComponentLink1URL=http://www.vishay.com/docs/20035/dcrcwe3.pdf, Composition="Thick Film", Contact Plating=Tin,Lead,Matte, Depth=1.25mm, Lead Free="Lead Free", Length=2mm, Military Standard=Not, Mount="Surface Mount", Packaging="Tape and Reel", Pricing 1="1=0.10000, 10=0.03500, 100=0.01400, 1000=0.00631, 2500=0.00548 (USD)", Radiation Hardening=No, REACH SVHC=Unknown, RoHS=Yes, Stock 1=2755291, Supplier 1=Digi-Key, Termination=SMD/SMT

## Via types
v1: diameter 50, hole 28, Top Layer to Bottom Layer, 51 vias

## Nets (pads, with @x,y where several pads share a name; then routed paths per layer and width w, separated by ;. In a path a pad name is that pad's centre, name@x,y a point inside that pad or via, vN(x,y) a via of type N, cw(c..) or ccw(c..) an arc to the next point about the centre after c; other vN are vias at no path point)
12V_BLUE: Q3.3 R1.1 R2.1 R3.1 R10.1 R11.1 R12.1 R20.1 R21.1 R22.1 R30.1 R31.1 R32.1 R39.1 R40.1 R46.1 R47.1 R52.1 R53.1 R54.1 R61.1 R62.1 R63.1 R70.1 R71.1 R72.1 R79.1 R80.1 R81.1 R88.1 R89.1 R94.1 R95.1 | length 26813.2
  Top Layer w10: R22.1@335.04,1513.87 v1@400.52,1513.87 ; R11.1@335.04,2655.6 402.25,2655.6 v1(403.86,2657.21) v1@405.46,2658.82 ; R1.1@335.04,3797.34 381.94,3797.34 405.46,3773.82 v1@405.46,2658.82 ; R39.1 R39.1@345.46,373.82 ; R1.1@336.64,3798.94 v1(336.64,3853.71) ; v1(433.78,373.82) R39.1@345.46,373.82 ; R30.1 1487.21,1515.05 1489.68,1517.53 1492.16,1515.05 v1@1545.05,1515.05 ; R12.1 1546.79,2656.79 v1(1550,2660) ; v1(1480,3853.71) 1480,3798.94 R2.1 1526.48,3798.52 1550,3775 v1(1550,2660) ; v1(1555,370) 1483.39,370 R40.1 1480.76,375 1490,375 1550,435 v1(1550,1516.25) 1550,1520 v1(1550,2660) ; R46.1 2622.49,375 R46.1@2631.54,375 ; R31.1 v1@2694.95,1515.05 ; R20.1 v1(2693.21,2656.79) v1@2695,2655 ; R3.1 2672.56,3797.44 2695,3775 v1@2695,2655 ; R3.1@2622.26,3797.65 v1(2622.26,3853.71) ; v1(2695,375) R46.1@2631.54,375 ; Q3.3@3003.94,903.54 3085.39,985 3200,985 3265,920 3265,555 3500,320 3500,100 3560,40 3785,40 3840.86,95.86 3840.86,303.93 3770.97,373.82 R47.1 3763.1,375 R47.1@3772.15,375 ; v1@3760,3860 v1(3760,3853.71) 3760,3800.44 R10.1 3831.48,3798.52 3870,3760 3870,2660 ; R32.1 3865.05,1515.05 v1@3870,1520 ; R21.1 3866.79,2656.79 3870,2660 ; R21.1@3780,2665 v1(3824.95,2709.95) ; v1(3845,375) R47.1@3772.15,375 ; R39.1@345.46,373.82 405.46,433.82 405.46,1516.35 405.46,1518.82 405.46,2657.21 v1@405.46,2658.82 ; R46.1@2631.54,375 2695,438.46 v1(2694.97,1515.03) v1@2695,2655 ; R47.1@3772.15,375 3870,472.85 v1@3870,1520 ; v1@3870,1520 3870,2660
  Bottom Layer w10: R72.1@129.3,1515.16 138.35,1515.16 172.17,1481.35 367.99,1481.35 v1(402.99,1516.35) ; R62.1@130.16,2656.03 139.22,2656.03 183.04,2612.21 358.86,2612.21 v1(403.86,2657.21) 641.64,2895 1550,2895 ; R52.1 145.28,3798.52 183.79,3760 385,3760 405,3780 405,3825 380,3850 340.35,3850 v1(336.64,3853.71) ; R81.1@140.36,368.82 174.18,335 394.96,335 v1(433.78,373.82) ; R79.1@1276.31,1515.07 1285.36,1515.07 1319.18,1481.25 1515,1481.25 v1(1550,1516.25) ; R63.1@1276.31,2658.82 1286.31,2648.82 1295.36,2648.82 1319.18,2625 1515,2625 v1(1550,2660) 1550,2895 ; R53.1 1288.63,3798.52 1327.15,3760 1528.36,3760 1548.36,3780 1548.36,3825 1523.36,3850 1483.71,3850 v1(1480,3853.71) ; R89.1@1281.31,368.82 1290.36,368.82 1324.18,335 1520,335 v1(1555,370) ; R70.1@2419.52,2655.6 2428.58,2655.6 2472.39,2611.79 2648.21,2611.79 v1(2693.21,2656.79) 2693.21,2895 ; R94.1 2430.36,373.82 2464.18,340 2660,340 v1(2695,375) ; R80.1@2421.28,1513.85 2430.34,1513.85 2464.15,1480.03 2659.97,1480.03 v1(2694.97,1515.03) ; R54.1 2430.36,3798.52 2468.88,3760 2670.09,3760 2690.09,3780 2690.09,3825 2665.09,3850 v1@2625.44,3850 ; R95.1 3570.97,373.82 3604.79,340 3800.61,340 v1@3835.61,375 ; R88.1 3570.97,1515.05 3611.03,1475 3825,1475 v1(3865,1515) ; R71.1 3571.92,2646.79 3580.97,2646.79 3607.76,2620 3795,2620 3824.95,2649.95 v1(3824.95,2709.95) 3824.95,2774.2 3704.14,2895 2693.21,2895 ; R61.1 3570.97,3798.52 3609.49,3760 3810.7,3760 3830.7,3780 3830.7,3825 3805.7,3850 3766.05,3850 v1@3762.34,3853.71 ; 1550,2895 2693.21,2895
12V_GREEN: Q2.3 R5.1 R7.1 R9.1 R14.1 R16.1 R18.1 R24.1 R26.1 R28.1 R34.1 R36.1 R38.1 R43.1 R45.1 R49.1 R51.1 R56.1 R58.1 R60.1 R65.1 R67.1 R69.1 R74.1 R76.1 R78.1 R83.1 R87.1 R91.1 R93.1 R97.1 R99.1 | length 25278.2
  Top Layer w10: R43.1 127.83,373.82 56.65,445 56.65,1515 ; R28.1 56.7,1515.05 56.65,1515 ; R16.1 58.43,2656.79 56.65,2655 ; R5.1 127.16,3798.52 56.65,3728 56.65,2655 ; R5.1@136.65,3798.94 v1(136.65,3853.71) v1@136.65,3855 ; R43.1@140.84,374.24 v1(140.84,570) ; R28.1@140.84,1515.48 v1(140.84,1711.24) ; R16.1@140.84,2657.21 v1(140.84,2852.97) ; R34.1 1200.05,1515.05 1200,1515 ; v1(1279.58,2852.54) R18.1 1201.79,2656.79 1200,2655 ; v1(1280,570) 1280,374.24 R45.1 1271.18,373.82 1200,445 1200,1515 ; R34.1@1280,1515.48 v1(1280,1711.24) ; v1@1280,3855 v1(1280,3853.71) 1280,3798.94 R7.1 1270.52,3798.52 1200,3728 1200,2655 ; v1(2421.31,569.58) R49.1 2412.91,373.82 2341.73,445 2341.73,1515 ; v1(2421.31,1710.81) R36.1 2341.79,1515.05 2341.73,1515 ; v1(2421.31,2852.54) R24.1 2343.52,2656.79 2341.73,2655 ; R9.1 2412.25,3798.52 2341.73,3728 2341.73,2655 ; R9.1@2421.73,3798.94 v1(2421.73,3853.71) v1@2421.73,3855 ; Q2.3@2925.2,753.94 Q2.3 2914.94,753.94 2887,726 2887,586 2861,560 2807,560 2781,586 2781,831 3020,1070 3475,1070 ; v1(3560,565) 3480,565 3475,570 ; v1(3560,3853.71) 3560,3800.44 R14.1 3548.52,3798.52 3475,3725 v1(3475,2660) ; R51.1 3552.86,373.82 3475,451.68 3475,570 ; R38.1 3556.97,1520 3551.97,1515 v1(3475,1515) ; R26.1 3560.13,2655 3555.13,2660 v1(3475,2660) ; 56.65,1515 56.65,2655 ; 1200,1515 1200,2655 ; 2341.73,1515 2341.73,2655 ; 3475,570 3475,1070 ; 3475,1070 v1(3475,1515) ; v1(3475,1515) v1(3475,2660)
  Bottom Layer w10: v1@129.3,1710.92 129.3,1606.11 220.24,1515.16 R78.1@229.3,1515.16 ; v1@130.16,2851.79 130.16,2746.97 221.11,2656.03 R67.1@230.16,2656.03 ; v1@131.31,564.58 131.31,459.76 222.25,368.82 R87.1@231.31,368.82 ; v1(136.65,3853.71) 141.31,3849.04 176.65,3849.04 227.16,3798.52 R56.1 ; v1(140.84,1711.24) 189.61,1760 1280,1760 ; v1@1276.31,1710.82 1276.31,1606.01 1371.78,1510.54 R83.1@1376.31,1515.07 ; v1@1276.31,2854.57 1276.31,2749.76 1367.25,2658.82 R69.1@1376.31,2658.82 ; v1(1280,1711.24) 1280,1760 ; v1(1280,3853.71) 1284.67,3849.04 1320,3849.04 1370.52,3798.52 R58.1 ; v1@1281.31,564.58 1281.31,459.76 1372.25,368.82 R93.1@1381.31,368.82 ; v1@2419.52,2851.36 2419.52,2746.55 2510.47,2655.6 R74.1@2519.52,2655.6 ; v1(2421.31,569.58) 2421.31,464.76 2512.25,373.82 R97.1 ; v1@2421.28,1709.6 2421.28,1604.79 2516.75,1509.32 2521.28,1513.85 ; v1(2421.31,1710.81) 2421.31,1760 ; v1(2421.73,3853.71) 2426.4,3849.04 2461.73,3849.04 2512.25,3798.52 R60.1 ; v1(3475,1515) 3525,1565 3602.92,1565 3652.86,1515.05 R91.1 3661.92,1623.08 3525,1760 2421.31,1760 ; v1(3475,2660) 3515,2700 3609.65,2700 3652.86,2656.79 R76.1 ; v1@3561.92,569.58 3561.92,464.76 3652.86,373.82 R99.1 ; v1@3562.34,3853.71 3567.01,3849.04 3602.34,3849.04 3652.86,3798.52 R65.1 ; 1280,1760 2421.31,1760
12V_RED: Q1.3 R4.2 R6.2 R8.2 R13.2 R15.2 R17.2 R23.2 R25.2 R27.2 R33.2 R35.2 R37.2 R42.2 R44.2 R48.2 R50.2 R55.2 R57.2 R59.2 R64.2 R66.2 R68.2 R73.2 R75.2 R77.2 R82.2 R84.2 R86.2 R90.2 R92.2 R96.2 R98.2 | length 27404.1
  Top Layer w10: R42.2 245.28,373.82 386.65,515.19 386.65,1455 366.65,1475 306.65,1475 286.65,1495 286.65,1515 ; R27.2 236.27,1515 286.65,1515 ; R15.2 236.93,2657.5 R15.2@240.84,2657.5 ; R4.2 245.28,3798.52 278.79,3765 361.65,3765 386.65,3740 386.65,2710 371.65,2695 301.65,2695 286.65,2680 286.65,2657.5 ; R4.2@236.65,3798.94 v1(236.65,3853.71) v1@236.65,3855 ; R42.2@240.84,374.24 v1(240.84,570) ; R27.2@240.84,1515.48 v1(240.84,1711.24) ; R15.2@240.84,2657.21 R15.2@240.84,2657.5 ; v1(240.84,2852.97) R15.2@240.84,2657.5 ; R33.2 1379.63,1515 1430,1515 ; v1(1379.58,2852.54) R17.2 1380.29,2657.5 1430,2657.5 ; v1(1380,570) 1380,374.24 R44.2 1388.63,373.82 1530,515.19 1530,1455 1510,1475 1450,1475 1430,1495 1430,1515 ; R33.2@1380,1515.48 v1(1380,1711.24) ; v1(1380,3853.71) 1380,3798.94 R6.2 1388.63,3798.52 1422.15,3765 1505,3765 1530,3740 1530,2710 1515,2695 1445,2695 1430,2680 1430,2657.5 ; v1(2521.31,569.58) R48.2 2530.36,373.82 2671.73,515.19 2671.73,1455 2651.73,1475 2591.73,1475 2571.73,1495 2571.73,1515 ; v1(2521.31,1710.81) R35.2 2521.36,1515 2571.73,1515 ; v1(2521.31,2852.54) R23.2 2522.02,2657.5 2571.73,2657.5 ; R8.2 2530.36,3798.52 2563.88,3765 2646.73,3765 2671.73,3740 2671.73,2710 2656.73,2695 2586.73,2695 2571.73,2680 2571.73,2657.5 ; R8.2@2521.73,3798.94 v1(2521.73,3853.71) v1@2521.73,3855 ; Q1.3@2841.73,604.33 2830.71,615.36 2830.71,800.71 3050.86,1020.86 3224.14,1020.86 3305,940 3305,570 3523.75,351.25 3523.75,351.15 3539.9,335 3615,335 3653.82,373.82 R50.2 ; v1(3660,2845) 3660,2658.7 R25.2 3708.21,2656.79 3710,2655 ; v1@3660,3855 v1(3660,3853.71) 3660,3800.44 R13.2 3670.97,3798.52 3701.06,3768.43 3835.57,3768.43 3854,3750 3854,2814 3710,2670 3710,2655 ; v1(3661.92,562.79) R50.2 ; R37.2 R37.2@3670.97,1515.05 ; v1(3665,1710) 3665,1521.03 R37.2@3670.97,1515.05 ; R15.2@240.84,2657.5 286.65,2657.5 ; 286.65,1515 286.65,1535 306.65,1555 367.36,1555 386.65,1574.28 386.65,2600 366.65,2620 301.65,2620 286.65,2635 286.65,2657.5 ; 1430,1515 1430,1535 1450,1555 1510.72,1555 1530,1574.28 1530,2600 1510,2620 1445,2620 1430,2635 1430,2657.5 ; 2571.73,1515 2571.73,1535 2591.73,1555 2652.45,1555 2671.73,1574.28 2671.73,2600 2651.73,2620 2586.73,2620 2571.73,2635 2571.73,2657.5 ; R50.2 3670.97,373.82 3840,542.85 3840,1460 3820,1480 3730,1480 3710,1500 3710,1515 ; R37.2@3670.97,1515.05 3709.95,1515.05 3710,1515 ; 3710,1515 3710,1530 3730,1550 3840,1550 3840,2610 3822.32,2627.68 3722.32,2627.68 3710,2640 3710,2655
  Bottom Layer w10: v1@229.3,1710.92 229.3,1606.11 320.24,1515.16 R77.2@329.3,1515.16 ; v1@230.16,2851.79 230.16,2746.97 321.11,2656.03 R66.2@330.16,2656.03 ; v1@231.31,564.58 231.31,459.76 322.25,368.82 R86.2@331.31,368.82 ; v1(236.65,3853.71) 241.31,3849.04 276.64,3849.04 327.16,3798.52 R55.2 ; v1(240.84,570) 295.84,625 1380,625 ; v1@1376.31,1710.82 1376.31,1606.01 1467.25,1515.07 R82.2@1476.31,1515.07 ; v1@1376.31,2854.57 1376.31,2749.76 1467.25,2658.82 R68.2@1476.31,2658.82 ; v1(1380,570) 1380,625 ; v1(1380,3853.71) 1384.67,3849.04 1420,3849.04 1470.52,3798.52 R57.2 ; v1@1381.31,564.58 1381.31,459.76 1473.41,367.66 1476.78,364.29 R92.2@1481.31,368.82 ; v1@2519.52,2851.36 2519.52,2746.55 2610.47,2655.6 R73.2@2619.52,2655.6 ; v1@2521.28,1709.6 2521.28,1604.79 2612.22,1513.85 R84.2@2621.28,1513.85 ; v1(2521.73,3853.71) 2526.4,3849.04 2561.73,3849.04 2612.25,3798.52 R59.2@2621.31,3798.52 ; R96.2 2616.78,369.29 2521.31,464.76 v1(2521.31,569.58) 2521.31,625 ; v1(3660,2845) 3761.92,2743.08 R75.2 ; v1@3662.34,3853.71 3667.01,3849.04 3702.34,3849.04 3752.86,3798.52 R64.2 ; v1(3665,1710) 3761.92,1613.08 R90.2 ; R98.2 3757.39,369.29 3661.92,464.76 v1(3661.92,562.79) 3599.71,625 2521.31,625 ; 1380,625 2521.31,625
+12V: D1.4 D2.4 D3.4 D4.4 D5.4 D6.4 D7.4 D8.4 D9.4 D10.4 D11.4 D12.4 D13.4 D14.4 D15.4 D16.4 D17.4 D18.4 D19.4 D20.4 D21.4 D22.4 D23.4 D24.4 D25.4 D26.4 D27.4 D28.4 D29.4 D30.4 D31.4 D32.4 F1.2
  other v1: 355,75 3770,95 3690,1140
BLUE_ENABLE: J1.4 Q3.1 R41.2 | length 576.9
  Top Layer w10: Q3.1@3098.43,866.14 R41.2@3150.06,866.14 ; J1.4 3149.61,865.69 R41.2@3150.06,866.14 ; R41.2 R41.2@3150.06,866.14
GND: J1.0 J1.5 J1.6 Q1.2 Q2.2 Q3.2 R19.1 R29.1 R41.1 | length 1973.9
  Top Layer w10: J1.0@2820.87,170.28 2820.87,180 3100.28,180 3228.35,308.07 J1.5 J1.6 3307.09,307.91 3399.61,215.39 J1.0@3399.61,170.28
  Top Layer w15: R19.1 2988.91,641.73 Q1.2 2926,641.73 2926,707 3011,792 3011,864 3088.67,941.67 R41.1 3159.45,941.67 3228.35,872.77 J1.5 ; Q2.2@3019.69,791.34 3071.32,791.34 R29.1
GREEN_ENABLE: J1.3 Q2.1 R29.2 | length 427.3
  Top Layer w10: Q2.1@3019.69,716.54 3019.75,716.47 R29.2 3070.87,715.69 J1.3
NetD1_1: D1.1 R4.1 | length 226.6
  Top Layer w10: D1.1@207.19,3508.76 207.19,3511.91 236.22,3540.94 R4.1
NetD1_2: D1.2 R5.2 | length 139.6
  Top Layer w10: R5.2 136.22,3687.2 207.19,3616.24 D1.2@207.19,3613.09
NetD1_3: D1.3 R1.2 | length 141.7
  Top Layer w10: D1.3@260.2,3613.09 336.22,3689.11 R1.2
NetD2_1: D2.1 R6.1 | length 226.6
  Top Layer w10: D2.1@1350.54,3508.76 1350.54,3511.91 1379.57,3540.94 R6.1
NetD2_2: D2.2 R7.2 | length 139.6
  Top Layer w10: R7.2 1279.58,3687.2 1350.54,3616.24 D2.2@1350.54,3613.09
NetD2_3: D2.3 R2.2 | length 141.7
  Top Layer w10: D2.3@1403.55,3613.09 1479.58,3689.11 R2.2
NetD3_1: D3.1 R8.1 | length 226.6
  Top Layer w10: D3.1@2492.27,3508.76 2492.27,3511.91 2521.31,3540.94 R8.1
NetD3_2: D3.2 R9.2 | length 139.6
  Top Layer w10: R9.2 2421.31,3687.2 2492.27,3616.24 D3.2@2492.27,3613.09
NetD3_3: D3.3 R3.2 | length 141.7
  Top Layer w10: D3.3@2546.02,3612.01 2622.05,3688.03 R3.2
NetD4_1: D4.1 R13.1 | length 226.6
  Top Layer w10: D4.1 3632.88,3511.91 3661.92,3540.94 R13.1
NetD4_2: D4.2 R14.2 | length 139.6
  Top Layer w10: R14.2 3561.92,3687.2 3632.88,3616.24 D4.2
NetD4_3: D4.3 R10.2 | length 141.7
  Top Layer w10: D4.3 3766.98,3689.11 R10.2@3766.98,3723.32
NetD5_1: D5.1 R15.1 | length 226.6
  Top Layer w10: D5.1 207.19,2370.17 236.22,2399.21 R15.1
NetD5_2: D5.2 R16.2 | length 139.6
  Top Layer w10: R16.2 136.22,2545.47 207.19,2474.5 D5.2
NetD5_3: D5.3 R11.2 | length 141.7
  Top Layer w10: D5.3@260.2,2471.35 336.22,2547.38 R11.2
NetD6_1: D6.1 R17.1 | length 226.6
  Top Layer w10: D6.1@1350.54,2367.02 1350.54,2370.17 1379.57,2399.21 R17.1
NetD6_2: D6.2 R18.2 | length 139.6
  Top Layer w10: R18.2 1279.58,2545.47 1350.54,2474.5 D6.2@1350.54,2471.35
NetD6_3: D6.3 R12.2 | length 141.7
  Top Layer w10: D6.3@1403.55,2471.35 1479.58,2547.38 R12.2
NetD7_1: D7.1 R23.1 | length 226.6
  Top Layer w10: D7.1@2492.27,2367.02 2492.27,2370.17 2521.31,2399.21 R23.1
NetD7_2: D7.2 R24.2 | length 139.6
  Top Layer w10: R24.2 2421.31,2545.47 2492.27,2474.5 D7.2@2492.27,2471.35
NetD7_3: D7.3 R20.2 | length 141.7
  Top Layer w10: D7.3@2545.28,2471.35 2621.31,2547.38 R20.2
NetD8_1: D8.1 R25.1 | length 226.6
  Top Layer w10: D8.1 3632.88,2370.17 3661.92,2399.21 R25.1
NetD8_2: D8.2 R26.2 | length 139.6
  Top Layer w10: R26.2 3561.92,2545.47 3632.88,2474.5 D8.2
NetD8_3: D8.3 R21.2 | length 141.7
  Top Layer w10: D8.3 3766.98,2547.38 R21.2@3766.98,2581.59
NetD9_1: D9.1 R27.1 | length 226.6
  Top Layer w10: D9.1 207.19,1228.44 236.22,1257.48 R27.1
NetD9_2: D9.2 R28.2 | length 139.6
  Top Layer w10: R28.2 136.22,1403.74 207.19,1332.77 D9.2
NetD9_3: D9.3 R22.2 | length 141.7
  Top Layer w10: D9.3@260.2,1329.62 336.22,1405.64 R22.2
NetD10_1: D10.1 R33.1 | length 226.6
  Top Layer w10: D10.1@1350.54,1225.29 1350.54,1228.44 1379.57,1257.48 R33.1
NetD10_2: D10.2 R34.2 | length 139.6
  Top Layer w10: R34.2 1279.58,1403.74 1350.54,1332.77 D10.2@1350.54,1329.62
NetD10_3: D10.3 R30.2 | length 141.7
  Top Layer w10: D10.3@1403.55,1329.62 1479.58,1405.64 R30.2
NetD11_1: D11.1 R35.1 | length 226.6
  Top Layer w10: D11.1@2492.27,1225.29 2492.27,1228.44 2521.31,1257.48 R35.1
NetD11_2: D11.2 R36.2 | length 139.6
  Top Layer w10: R36.2 2421.31,1403.74 2492.27,1332.77 D11.2@2492.27,1329.62
NetD11_3: D11.3 R31.2 | length 141.7
  Top Layer w10: D11.3@2545.28,1329.62 2621.31,1405.64 R31.2
NetD12_1: D12.1 R37.1 | length 226.6
  Top Layer w10: D12.1 3632.88,1228.44 3661.92,1257.48 R37.1
NetD12_2: D12.2 R38.2 | length 139.6
  Top Layer w10: R38.2 3561.92,1403.74 3632.88,1332.77 D12.2
NetD12_3: D12.3 R32.2 | length 139.6
  Top Layer w10: D12.3 3690.95,1332.77 3761.92,1403.74 R32.2
NetD13_1: D13.1 R42.1 | length 226.6
  Top Layer w10: D13.1 207.19,87.2 236.22,116.24 R42.1
NetD13_2: D13.2 R43.2 | length 139.6
  Top Layer w10: R43.2 136.22,262.5 207.19,191.53 D13.2
NetD13_3: D13.3 R39.2 | length 141.7
  Top Layer w10: D13.3@260.2,188.39 336.22,264.41 R39.2
NetD14_1: D14.1 R44.1 | length 226.6
  Top Layer w10: D14.1@1350.54,84.05 1350.54,87.2 1379.57,116.24 R44.1
NetD14_2: D14.2 R45.2 | length 139.6
  Top Layer w10: R45.2 1279.58,262.5 1350.54,191.53 D14.2@1350.54,188.39
NetD14_3: D14.3 R40.2 | length 141.7
  Top Layer w10: D14.3@1403.55,188.39 1479.58,264.41 R40.2
NetD15_1: D15.1 R48.1 | length 226.6
  Top Layer w10: D15.1@2492.27,84.05 2492.27,87.2 2521.31,116.24 R48.1
NetD15_2: D15.2 R49.2 | length 139.6
  Top Layer w10: R49.2 2421.31,262.5 2492.27,191.53 D15.2@2492.27,188.39
NetD15_3: D15.3 R46.2 | length 141.7
  Top Layer w10: D15.3@2545.28,188.39 2621.31,264.41 R46.2
NetD16_1: D16.1 R50.1 | length 226.6
  Top Layer w10: D16.1 3632.88,87.2 3661.92,116.24 R50.1
NetD16_2: D16.2 R51.2 | length 139.6
  Top Layer w10: R51.2 3561.92,262.5 3632.88,191.53 D16.2
NetD16_3: D16.3 R47.2 | length 139.6
  Top Layer w10: D16.3 3690.95,191.53 3761.92,262.5 R47.2
NetD17_1: D17.1 R55.1 | length 244.4
  Bottom Layer w10: D17.1@264.13,3508.76 264.13,3511.91 336.22,3583.99 R55.1
NetD17_2: D17.2 R56.2 | length 121.8
  Bottom Layer w10: R56.2 236.22,3644.15 264.13,3616.24 D17.2@264.13,3613.09
NetD17_3: D17.3 R52.2 | length 139.2
  Bottom Layer w10: R52.2 136.22,3686.08 206.06,3616.24 D17.3@206.06,3613.09
NetD18_1: D18.1 R57.1 | length 244.4
  Bottom Layer w10: D18.1 1407.49,3511.91 1479.58,3583.99 R57.1
NetD18_2: D18.2 R58.2 | length 121.8
  Bottom Layer w10: R58.2 1379.58,3644.15 1407.49,3616.24 D18.2
NetD18_3: D18.3 R53.2 | length 139.2
  Bottom Layer w10: R53.2 1279.58,3686.08 1349.42,3616.24 D18.3
NetD19_1: D19.1 R59.1 | length 244.4
  Bottom Layer w10: D19.1 2549.22,3511.91 2621.31,3583.99 R59.1@2621.31,3723.32
NetD19_2: D19.2 R60.2 | length 121.8
  Bottom Layer w10: R60.2 2521.31,3644.15 2549.22,3616.24 D19.2
NetD19_3: D19.3 R54.2 | length 139.2
  Bottom Layer w10: R54.2 2421.31,3686.08 2491.15,3616.24 D19.3
NetD20_1: D20.1 R64.1 | length 244.4
  Bottom Layer w10: D20.1@3689.83,3508.76 3689.83,3511.91 3761.92,3583.99 R64.1
NetD20_2: D20.2 R65.2 | length 121.8
  Bottom Layer w10: R65.2 3661.92,3644.15 3689.83,3616.24 D20.2@3689.83,3613.09
NetD20_3: D20.3 R61.2 | length 139.2
  Bottom Layer w10: R61.2 3561.92,3686.08 3631.76,3616.24 D20.3@3631.76,3613.09
NetD21_1: D21.1 R66.1 | length 244.4
  Bottom Layer w10: D21.1@264.13,2367.02 264.13,2370.17 336.22,2442.26 R66.1
NetD21_2: D21.2 R67.2 | length 121.8
  Bottom Layer w10: R67.2 236.22,2502.42 264.13,2474.5 D21.2@264.13,2471.35
NetD21_3: D21.3 R62.2 | length 139.2
  Bottom Layer w10: R62.2 136.22,2544.35 206.06,2474.5 D21.3@206.06,2471.35
NetD22_1: D22.1 R68.1 | length 244.4
  Bottom Layer w10: D22.1 1407.49,2370.17 1479.58,2442.26 R68.1
NetD22_2: D22.2 R69.2 | length 121.8
  Bottom Layer w10: R69.2 1379.58,2502.42 1407.49,2474.5 D22.2
NetD22_3: D22.3 R63.2 | length 139.2
  Bottom Layer w10: R63.2 1279.58,2544.35 1349.42,2474.5 D22.3
NetD23_1: D23.1 R73.1 | length 244.4
  Bottom Layer w10: D23.1 2549.22,2370.17 2621.31,2442.26 R73.1
NetD23_2: D23.2 R74.2 | length 121.8
  Bottom Layer w10: R74.2 2521.31,2502.42 2549.22,2474.5 D23.2
NetD23_3: D23.3 R70.2 | length 139.2
  Bottom Layer w10: R70.2 2421.31,2544.35 2491.15,2474.5 D23.3
NetD24_1: D24.1 R75.1 | length 244.4
  Bottom Layer w10: D24.1@3689.83,2367.02 3689.83,2370.17 3761.92,2442.26 R75.1
NetD24_2: D24.2 R76.2 | length 121.8
  Bottom Layer w10: R76.2 3661.92,2502.42 3689.83,2474.5 D24.2@3689.83,2471.35
NetD24_3: D24.3 R71.2 | length 139.2
  Bottom Layer w10: R71.2 3561.92,2544.35 3631.76,2474.5 D24.3@3631.76,2471.35
NetD25_1: D25.1 R77.1 | length 244.4
  Bottom Layer w10: D25.1@264.13,1225.29 264.13,1228.44 336.22,1300.53 R77.1
NetD25_2: D25.2 R78.2 | length 121.8
  Bottom Layer w10: R78.2 236.22,1360.68 264.13,1332.77 D25.2@264.13,1329.62
NetD25_3: D25.3 R72.2 | length 139.2
  Bottom Layer w10: R72.2 136.22,1402.61 206.06,1332.77 D25.3@206.06,1329.62
NetD26_1: D26.1 R82.1 | length 244.4
  Bottom Layer w10: D26.1 1407.49,1228.44 1479.58,1300.53 R82.1
NetD26_2: D26.2 R83.2 | length 121.8
  Bottom Layer w10: R83.2 1379.58,1360.68 1407.49,1332.77 D26.2
NetD26_3: D26.3 R79.2 | length 139.2
  Bottom Layer w10: R79.2 1279.58,1402.61 1349.42,1332.77 D26.3
NetD27_1: D27.1 R84.1 | length 244.4
  Bottom Layer w10: D27.1 2549.22,1228.44 2621.31,1300.53 R84.1
NetD27_2: D27.2 | length 121.8
  Bottom Layer w10: 2521.31,1439.86 2521.31,1360.68 2549.22,1332.77 D27.2
NetD27_3: D27.3 R80.2 | length 139.2
  Bottom Layer w10: R80.2 2421.31,1402.61 2491.15,1332.77 D27.3
NetD28_1: D28.1 R86.1 | length 244.4
  Bottom Layer w10: D28.1@264.13,84.05 264.13,87.2 336.22,159.29 R86.1
NetD28_2: D28.2 R87.2 | length 121.8
  Bottom Layer w10: R87.2 236.22,219.45 264.13,191.53 D28.2@264.13,188.39
NetD28_3: D28.3 R81.2 | length 139.2
  Bottom Layer w10: R81.2 136.22,261.38 206.06,191.53 D28.3@206.06,188.39
NetD29_1: D29.1 R90.1 | length 244.4
  Bottom Layer w10: D29.1@3689.83,1225.29 3689.83,1228.44 3761.92,1300.53 R90.1
NetD29_2: D29.2 R91.2 | length 121.8
  Bottom Layer w10: R91.2 3661.92,1360.68 3689.83,1332.77 D29.2@3689.83,1329.62
NetD29_3: D29.3 R88.2 | length 139.2
  Bottom Layer w10: R88.2 3561.92,1402.61 3631.76,1332.77 D29.3@3631.76,1329.62
NetD30_1: D30.1 R92.1 | length 244.4
  Bottom Layer w10: D30.1 1407.49,87.2 1479.58,159.29 R92.1
NetD30_2: D30.2 R93.2 | length 121.8
  Bottom Layer w10: R93.2 1379.58,219.45 1407.49,191.53 D30.2
NetD30_3: D30.3 R89.2 | length 139.2
  Bottom Layer w10: R89.2 1279.58,261.38 1349.42,191.53 D30.3
NetD31_1: D31.1 R96.1 | length 244.4
  Bottom Layer w10: D31.1 2549.22,87.2 2621.31,159.29 R96.1
NetD31_2: D31.2 R97.2 | length 121.8
  Bottom Layer w10: R97.2 2521.31,219.45 2549.22,191.53 D31.2
NetD31_3: D31.3 R94.2 | length 139.2
  Bottom Layer w10: R94.2 2421.31,261.38 2491.15,191.53 D31.3
NetD32_1: D32.1 R98.1 | length 244.4
  Bottom Layer w10: D32.1@3689.83,84.05 3689.83,87.2 3761.92,159.29 R98.1
NetD32_2: D32.2 R99.2 | length 121.8
  Bottom Layer w10: R99.2 3661.92,219.45 3689.83,191.53 D32.2@3689.83,188.39
NetD32_3: D32.3 R95.2 | length 139.2
  Bottom Layer w10: R95.2 3561.92,261.38 3631.76,191.53 D32.3@3631.76,188.39
NetF1_1: F1.1 J1.1 | length 742.1
  Top Layer w20: F1.1 2745,940 2745,543.39 2913.39,375 J1.1
RED_ENABLE: J1.2 Q1.1 R19.2 | length 279.2
  Top Layer w10: Q1.1@2936.22,566.93 2988.52,566.93 R19.2 2992.13,563.32 J1.2
pads on no net: MH1.0 MH2.0

## Polygon pours and split planes (outlines as drawn)
+12V on Bottom Layer (solid, pour order 6): 0.5,4379.53 195.03,4185 5850.03,4185 5850.03,305 5155.03,-390 0.5,-390
+12V on Bottom Layer (solid, pour order 10): 4690,2010
+12V on Bottom Layer (solid, pour order 8): 10140,2620
+12V on Top Layer (solid, pour order 4): 0,4291.14 5,4296.14 60,4241.14 4030,4241.14 4405,3866.14 4405,-53.86 175,-53.86 0,-228.86

## Silkscreen, mask and mechanical layers (free items; w line width, h text height)
Mechanical 1:
  circle w0.5: c3661.92,3109.74 r59.06
  circle w0.5: c3661.92,786.9 r59.06
  circle w0.5: c1378.45,1377.46 r59.06
  circle w0.5: c2520.19,3660.92 r59.06
  circle w0.5: c3661.92,2519.19 r59.06
  circle w0.5: c1378.45,3660.92 r59.06
  circle w0.5: c3661.92,3660.92 r59.06
  circle w0.5: c236.72,3660.92 r59.06
  circle w0.5: c3661.92,235.72 r59.06
  circle w0.5: c236.72,2519.19 r59.06
  circle w0.5: c2520.19,235.72 r59.06
  circle w0.5: c236.72,1377.46 r59.06
  circle w0.5: c3661.92,1377.46 r59.06
  circle w0.5: c2520.19,1377.46 r59.06
  circle w0.5: c1378.45,2519.19 r59.06
  circle w0.5: c1378.45,235.72 r59.06
  circle w0.5: c2520.19,2519.19 r59.06
  circle w0.5: c236.72,235.72 r59.06
  lines w0.5: 0.5,117.61 ccw(c118.61,117.61) 118.61,-0.5 3780.03,-0.5 ccw(c3780.03,117.61) 3898.14,117.61 3898.14,3779.03 ccw(c3780.03,3779.03) 3780.03,3897.14 118.61,3897.14 ccw(c118.61,3779.03) 0.5,3779.03 0.5,117.61